# Altium PCB Курсовая.PcbDoc
Units mm, origin at the board's own origin, x right, y up, seen from the top; angles counter-clockwise.
Board outline 43.05 x 29.72 mm, 2 copper layers (Top Layer, Bottom Layer); 16 components, 14 nets, 40 pads, 3 vias.
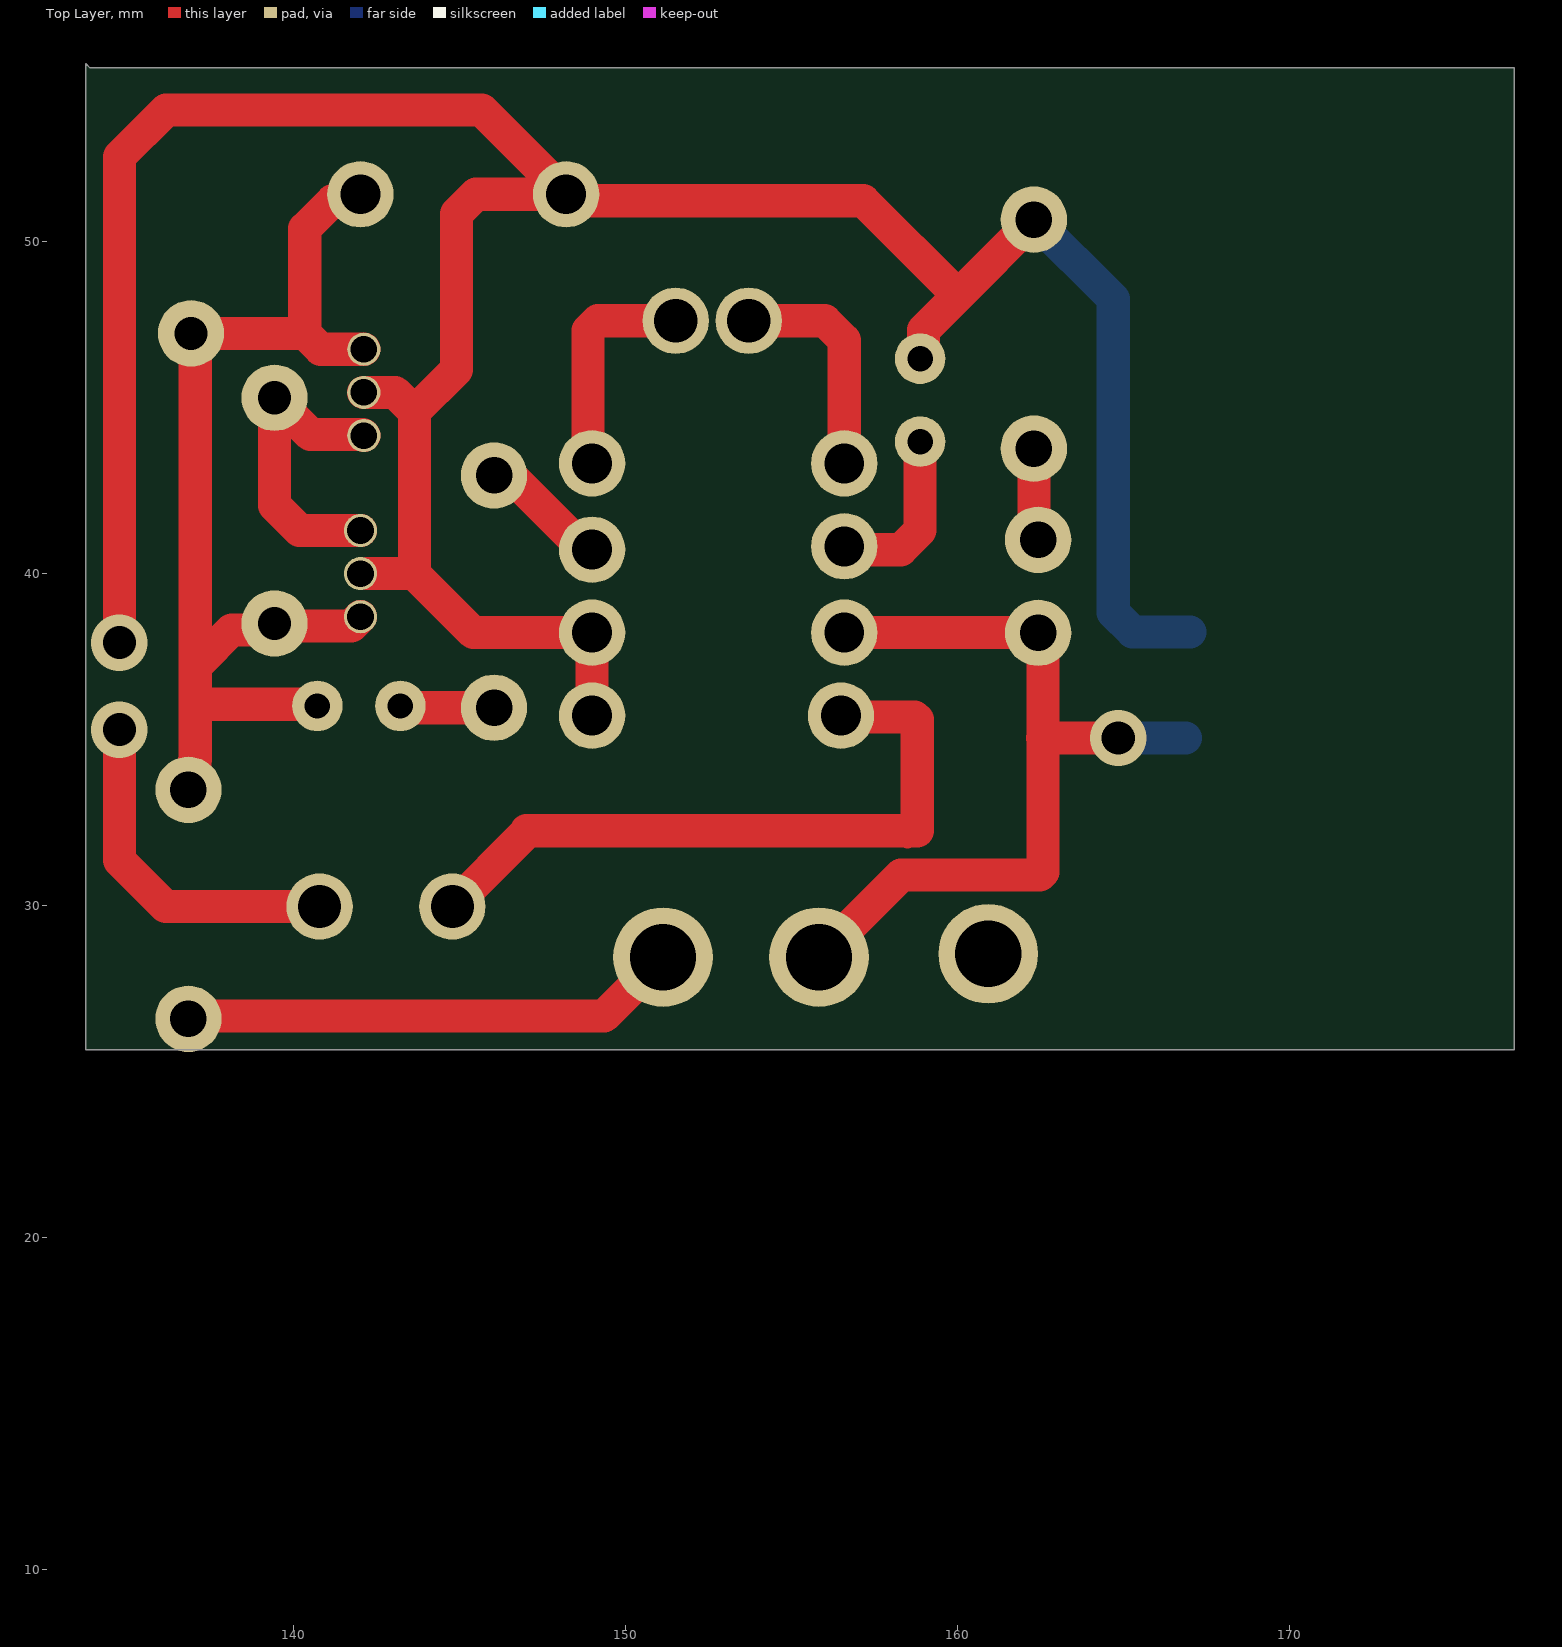
[diagram p0: Top Layer view]
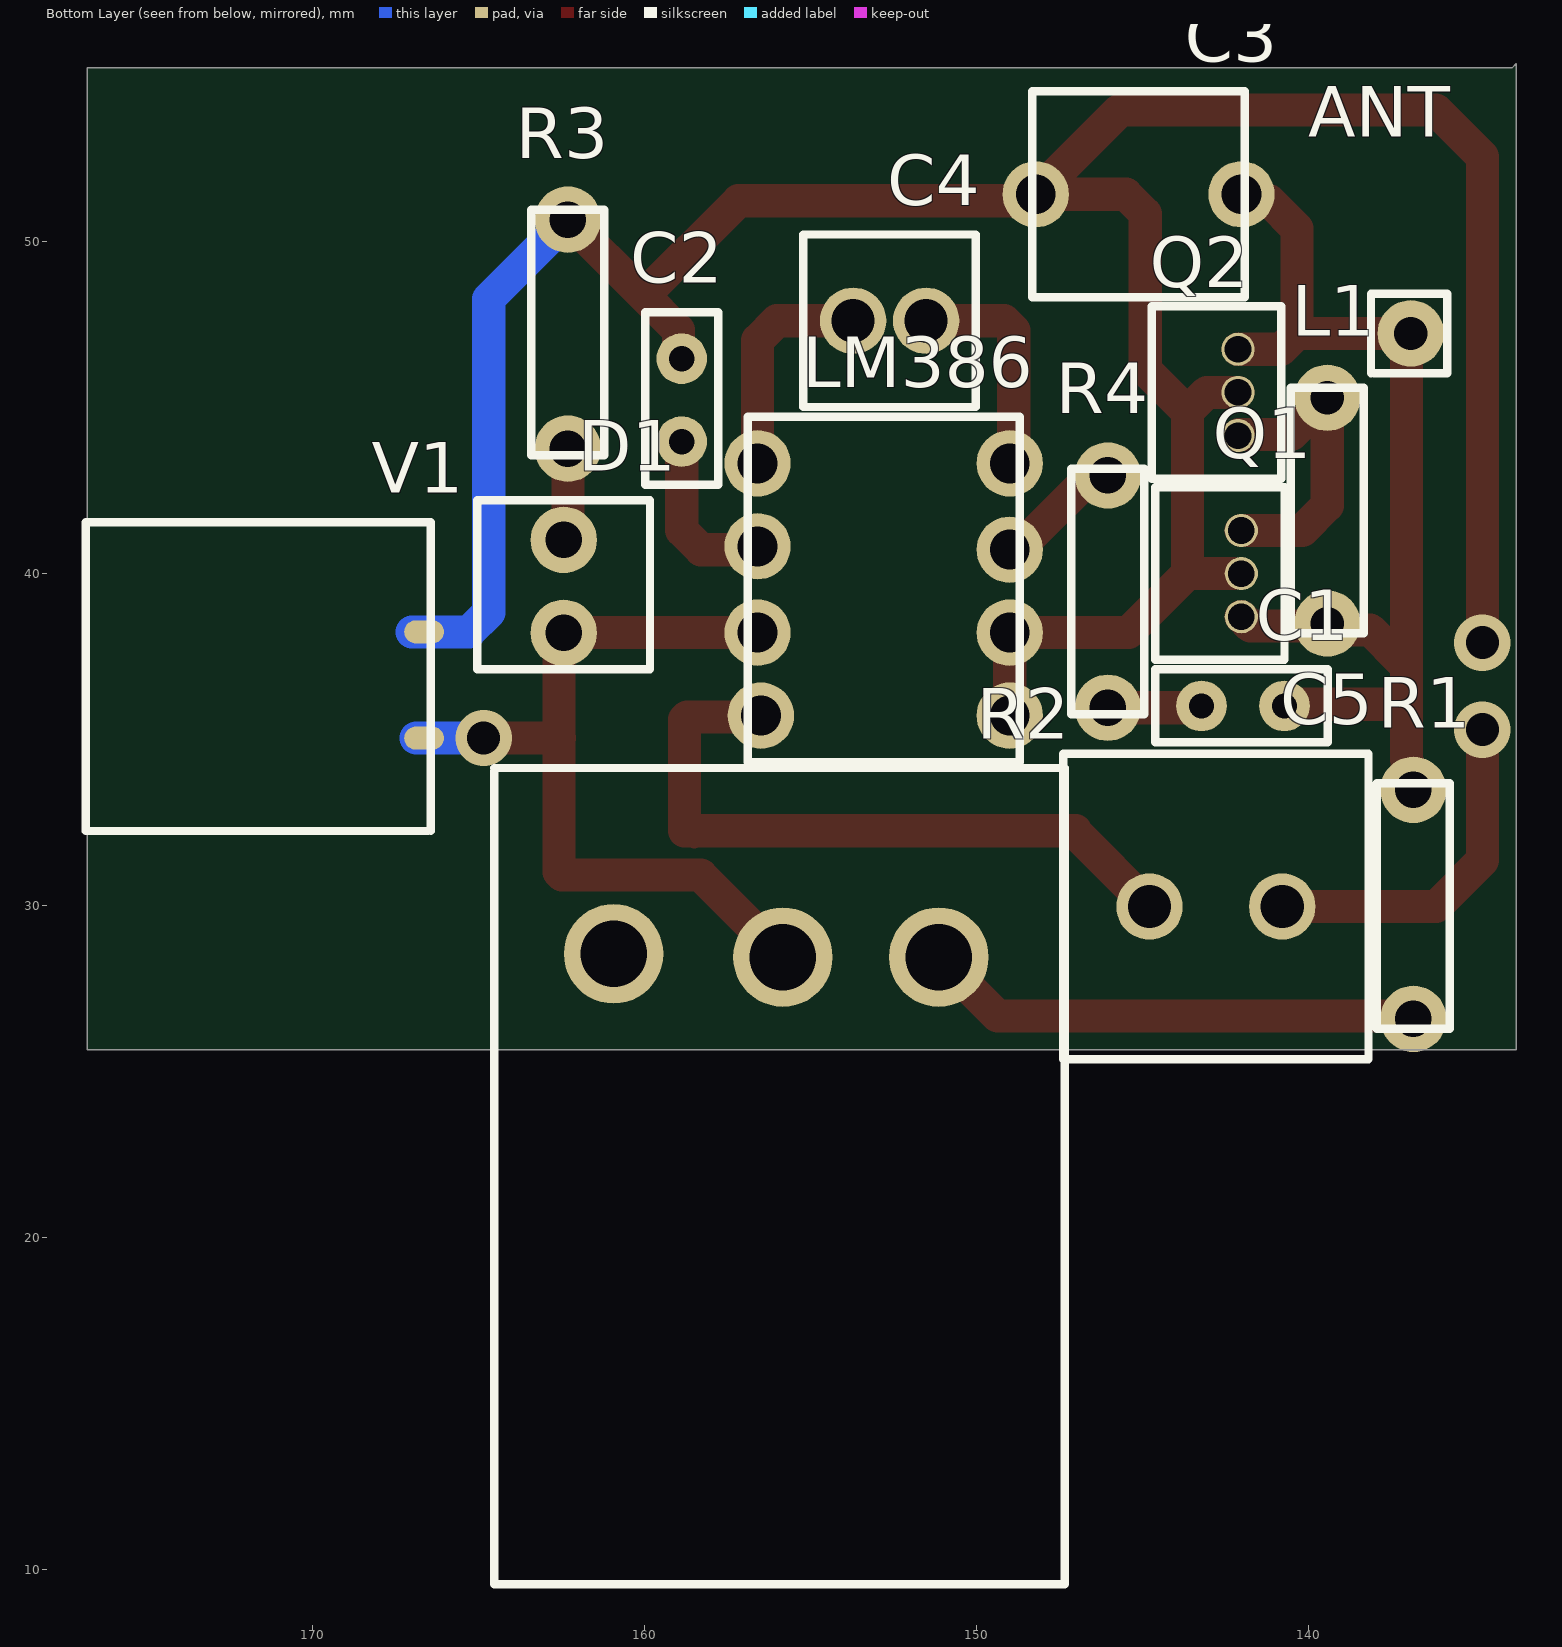
[diagram p1: Bottom Layer view, seen from below]

## Layer stack, top to bottom
Top Solder: solder mask 0.0102, Solder Resist, Dk 3.5
Top Layer: signal copper 0.0356
Dielectric 1: dielectric 0.32, FR-4, Dk 4.8
Bottom Layer: signal copper 0.0356
Bottom Solder: solder mask 0.0102, Solder Resist, Dk 3.5

## Board outline
133.731,25.654 133.731,55.372 133.858,55.245 176.784,55.245 176.784,25.654

## Design rules (kind name [scope] priority, off if disabled: settings)
Clearance [All] p1: gap=0.3 ignorepadtopadclearanceinfootprint=FALSE
PolygonConnect [All] p1: connectstyle=Relief reliefconductorwidth=0.254 reliefentries=4 polygonreliefangle="90 Angle" airgapwidth=0.254
RoutingVias [All] p1: holewidth=1 width=2 viastyle="Through Hole" minholewidth=1 minwidth=1.5 maxholewidth=1.5 maxwidth=2
SolderMaskExpansion [All] p1: expansion=0.102 istentingtop=FALSE
Width [All] p1: maxlimit=1.5 minlimit=0.3 preferedwidth=1
30 further rules are at their usual default settings.

## Components (designator, comment, footprint, x,y, rotation, side; value= is the part's Value field where it differs from the comment)
ANT "ANT" ANT 135.706,47.344 r90 bottom
C1 "100n" "100n capacitor" 141.913,37.719 r0 bottom
C2 "100n" "100n capacitor" 157.177,45.182 r90 bottom
C3 "6.5-30p" "6-30pF capacitor" 148.409,51.335 r180 bottom
C4 "10u" "10uF capacitor" 149.511,48.325 r0 bottom
C5 "470u" "Capacitor 470u" 137.08,30.472 r0 bottom
D1 "LTW-M140ZVS" LED 162.433,42.421 r270 bottom
L1 "15u" "15uH inductor" 137.922,41.402 r90 bottom
LM386 "LM386N-3" LM386 168.791,35.527 r180 bottom
Q1 "BF199" BF199 140.113,40.205 r90 bottom
Q2 "BF199" BF199 140.213,45.666 r90 bottom
R1 "4.7K" "4.7K resistor" 138.528,30.988 r270 bottom
R2 "1-25K" Potentiometer 166.129,23.048 r180 bottom
R3 "100" "100Ohm resistor" 160.406,46.473 r90 bottom
R4 "10K" "10K resistor" 143.736,38.862 r90 bottom
V1 "5V" "mini-USb port" 177.038,36.449 r0 bottom

## Footprints (in the part's own frame and the unit in brackets; to place one, negate y for a bottom-side part, rotate by r counter-clockwise, add the part's x,y. Pads: shape width x height; smd on the part's side, far side on the other; paste and mask are expansions set on the pad)
"4.7K resistor" [mm]
  round 2 hole 1.1: 29(-2.5,1.7) 30(4.4,1.7)
  silkscreen extent -2.7,0.6 4.7,2.8, body extent -2.6,0.7 4.6,2.7, height 2.2
"6-30pF capacitor" [mm]
  round 2 hole 1.2: 21(0.2,0.1) 22(6.4,0.1)
  silkscreen extent 0.1,-3 6.5,3.2, body extent 0.2,-2.9 6.4,3.1, height 5.5
"10K resistor" [mm]
  round 2 hole 1.1: 31(-2.9,2.3) 32(4.1,2.3)
  silkscreen extent -3.1,1.2 4.3,3.4, body extent -3,1.3 4.2,3.3, height 2.2
"10uF capacitor" [mm]
  round 2 hole 1.3: 23(2,0.7) 24(4.2,0.7)
  silkscreen extent 0.5,-1.9 5.7,3.3, body extent 0.6,-1.8 5.6,3.2, height 11
"15uH inductor" [mm]
  round 2 hole 1: 25(3.9,1.5) 26(-2.9,1.5)
  silkscreen extent -3.2,0.4 4.2,2.6, body extent -3.1,0.5 4.1,2.5, height 2.2
"100n capacitor" [mil]
  round 60 hole 30: 19(-47.24,66.93) 20(51.18,66.93)
  silkscreen extent -98,24 106,110, body extent -94,28 102,106, height 236
"100Ohm resistor" [mm]
  round 2 hole 1.1: 27(-2.7,1.9) 28(4.2,1.9)
  silkscreen extent -2.9,0.8 4.5,3, body extent -2.8,0.9 4.4,2.9, height 2.2
ANT [mm]
  round 2 hole 1: 35(-0.1,1.2)
  silkscreen extent -1.3,0.1 1.1,2.4, body extent -4.95,0.95 5.05,1.45, height 10.5
BF199 [mm]
  round 1 hole 0.8: 11(-1.5,1.9) 12(-0.2,1.9) 13(1.1,1.9)
  silkscreen extent -2.8,0.6 2.4,4.5, body extent -2.7,0.7 2.3,4.4, height 5.5
"Capacitor 470u" [mm]
  round 2 hole 1.3: 9(3.7,0.5) 10(7.7,0.5)
  silkscreen extent 1.1,-4.1 10.3,5.1, body extent 1.2,-4 10.2,5, height 11.8
LED [mm]
  round 2 hole 1.1: 33(1.4,0) 34(4.2,0)
  silkscreen extent 0.2,-2.6 5.3,2.6, body extent 0.3,-2.5 5.2,2.5, height 9.5
LM386 [mm]
  round 2 hole 1.2: 1(12.2,7.8) 2(12.2,5.3) 3(12.2,2.7) 4(12.3,0.2) 5(19.8,0.2) 6(19.8,2.7) 7(19.8,5.2) 8(19.8,7.8)
  silkscreen extent 11.9,-1.2 20.1,9.2, body extent 12.04,-1.1 19.96,9.1, height 4.2
"mini-USb port" [mm]
  oval 1.2x0.7 smd: 17(-10.4,1.4) 18(-10.4,-1.8)
  silkscreen extent -10.6,-5.1 -0.2,4.2, body extent -10.4,-4.9 -0.4,4.1, height 3
Potentiometer [mm]
  round 3 hole 2: 14(5.2,5.5) 15(10.3,5.4) 16(15,5.4)
  silkscreen extent 1.6,-13.5 18.8,11.1, body extent 1.75,-13.4 18.65,10.9, height 23.45

## Part data
C1: library part CL05A104KP5NNND_1, "Cap Ceramic 0.1uF 10V X5R 10% SMD 0402 85C Paper T/R", Capacitance=100nF, Case/Package=0402, Dielectric=X5R, Manufacturer=Samsung, Manufacturer Part Number=CL05A104KP5NNND, Max Operating Temperature=85°C, Min Operating Temperature=-55°C, Package Quantity=50000, Supplier Part Number 1=CL05A104KP5NNND-ND, Tolerance=10%, Voltage=10V, Category="Ceramic Capacitors", ComponentLink1Description=https://datasheet.ciiva.com/25744/cl05a104kp5nnnd-25744885.pdf?src-supplier=Digi-Key, ComponentLink1URL=https://datasheet.ciiva.com/25744/cl05a104kp5nnnd-25744885.pdf?src-supplier=Digi-Key, ComponentLink2Description=https://datasheet.ciiva.com/26838/getdatasheetpartid-353245-26838153.pdf?src-supplier=Verical, ComponentLink2URL=https://datasheet.ciiva.com/26838/getdatasheetpartid-353245-26838153.pdf?src-supplier=Verical, Construction=Flat, Depth=0.5mm, Height=0.5mm, Lead Free="Lead Free", Length=1mm, Mount="Surface Mount", Packaging="Tape and Reel", Pricing 1="250000=0,00182 (USD)", Radiation Hardening=No, RoHS=Yes, RoHS Compliant=Yes, Series=CL, Supplier 1=Digi-Key, Thickness=0.022inch, Voltage Rating=10V, Voltage Rating (DC)=10V, Width=0.02inch
C2: library part CL05A104KP5NNND, "Cap Ceramic 0.1uF 10V X5R 10% SMD 0402 85C Paper T/R", Capacitance=100nF, Case/Package=0402, Dielectric=X5R, Manufacturer=Samsung, Max Operating Temperature=85°C, Min Operating Temperature=-55°C, Package Quantity=50000, Supplier Part Number 1=CL05A104KP5NNND-ND, Tolerance=10%, Voltage=10V, Category="Ceramic Capacitors", ComponentLink1Description=https://datasheet.ciiva.com/25744/cl05a104kp5nnnd-25744885.pdf?src-supplier=Digi-Key, ComponentLink1URL=https://datasheet.ciiva.com/25744/cl05a104kp5nnnd-25744885.pdf?src-supplier=Digi-Key, ComponentLink2Description=https://datasheet.ciiva.com/26838/getdatasheetpartid-353245-26838153.pdf?src-supplier=Verical, ComponentLink2URL=https://datasheet.ciiva.com/26838/getdatasheetpartid-353245-26838153.pdf?src-supplier=Verical, Construction=Flat, Depth=0.5mm, Height=0.5mm, Lead Free="Lead Free", Length=1mm, Manufacturer Part Number=CL05A104KP5NNND, Mount="Surface Mount", Packaging="Tape and Reel", Pricing 1="250000=0,00182 (USD)", Radiation Hardening=No, RoHS=Yes, RoHS Compliant=Yes, Series=CL, Supplier 1=Digi-Key, Thickness=0.022inch, Voltage Rating=10V, Voltage Rating (DC)=10V, Width=0.02inch
C3: library part GKG30086-05, "Cap Trimmer SMD", Manufacturer="Sprague Goodman", Supplier Part Number 1=SG9122CT-ND, Category="Trimmer / Variable Capacitors", Manufacturer Part Number=GKG30086-05, Pricing 1="1=1,64000, 10=1,59900, 50=1,56820 (USD)", RoHS=Yes, Stock 1=3567, Supplier 1=Digi-Key
C4: library part 106CKE063M, "Aluminum Electrolytic Capacitors - Radial Leaded 10uF 63 Volts 20% LYTICS/IC", Capacitance=10uF, Case/Package=Radial, ESR (Equivalent Series Resistance)=14.9208R, Manufacturer="CDE Illinois Capacitor", Max Operating Temperature=105°C, Min Operating Temperature=-40°C, Package Quantity=1000, Ripple Current=60mA, Supplier Part Number 1=106CKE063M-ND, Tolerance=20%, Voltage Rating=63V, Category="Aluminum Electrolytic Capacitors", ComponentLink1Description=http://www.illinoiscapacitor.com/pdf/seriesDocuments/CKH_CKE%20series.pdf?src-supplier=Digi-Key, ComponentLink1URL=http://www.illinoiscapacitor.com/pdf/seriesDocuments/CKH_CKE%20series.pdf?src-supplier=Digi-Key, Height - Seated (Max)=0.492inch, Lead Pitch=0.079inch, Life (Hours)=2000Hour, Manufacturer Part Number=106CKE063M, Mount="Through Hole", Packaging=Bulk, Polarity=Polar, Pricing 1="10000=0,03278 (USD)", RoHS=Yes, RoHS Compliant=Yes, Supplier 1=Digi-Key
C5: library part ECA-0JHG471B, "Cap Aluminum 470uF 6.3V 20% (6.3 X 11.2mm) Radial 5mm 230mA 1000 hr 105C Ammo Pack", Capacitance=470uF, Case/Package=Radial, Manufacturer=Panasonic, Max Operating Temperature=105°C, Min Operating Temperature=-55°C, Package Quantity=2000, Ripple Current=230mA, Supplier Part Number 1=ECA-0JHG471B-ND, Tolerance=20%, Voltage Rating=6.3V, Category="Aluminum Electrolytic Capacitors", ComponentLink1Description=https://datasheet.ciiva.com/24067/a-e-461514-24067782.pdf?src-supplier=Mouser, ComponentLink1URL=https://datasheet.ciiva.com/24067/a-e-461514-24067782.pdf?src-supplier=Mouser, ComponentLink2Description=https://datasheet.ciiva.com/106/aba0000ce26-106251.pdf?src-supplier=Digi-Key, ComponentLink2URL=https://datasheet.ciiva.com/106/aba0000ce26-106251.pdf?src-supplier=Digi-Key, ComponentLink3Description=https://datasheet.ciiva.com/11680/aba0000ce26-11680205.pdf?src-supplier=Avnet, ComponentLink3URL=https://datasheet.ciiva.com/11680/aba0000ce26-11680205.pdf?src-supplier=Avnet, Diameter=6.3mm, Height=11.2mm, Height - Seated (Max)=0.48inch, Lead Pitch=5mm, Lead/Base Style=Straight, Length=11.2mm, Life (Hours)=1000Hour, Manufacturer Part Number=ECA-0JHG471B, Mount="Through Hole", Packaging="Tape and Reel", Pricing 1="4000=0,07820 (USD)", Radiation Hardening=No, RoHS=Yes, Supplier 1=Digi-Key, Termination=Radial, Voltage Rating (DC)=6.3V
D1: "White 120° Viewing Angle 3 x 1.05 x 1.2 mm 3.5 V 20 mA Surface Mount Lamp", Case/Package=SMD/SMT, Color=White, Correlated Color Temperature (CCT)=-, Forward Current=20mA, Forward Voltage=3.2V, Lens Color=Yellow, Manufacturer="Vishay Lite-On", Max Current Rating=100mA, Max Operating Temperature=85°C, Min Operating Temperature=-30°C, Package Quantity=2000, Supplier Part Number 1=859-LTW-M140ZVS, Category=LEDs, ComponentLink1Description=https://datasheet.ciiva.com/29560/ltw-m140zvs-29560007.pdf?src-supplier=Digi-Key, ComponentLink1URL=https://datasheet.ciiva.com/29560/ltw-m140zvs-29560007.pdf?src-supplier=Digi-Key, ComponentLink2Description=https://datasheet.ciiva.com/24120/ltw-m140zvs-267545-24120598.pdf?src-supplier=Mouser, ComponentLink2URL=https://datasheet.ciiva.com/24120/ltw-m140zvs-267545-24120598.pdf?src-supplier=Mouser, Illumination Color=White, Length=3mm, Lens Style=Rectangular, Manufacturer Part Number=LTW-M140ZVS, Orientation="Top View", Packaging="Tape and Reel", Pricing 1="1=0,45000, 10=0,25000, 50=0,25000, 100=0,11500, 1000=0,08300, 10000=0,05800 (USD)", RoHS=Yes, RoHS Compliant=Yes, Stock 1=14030, Supplier 1=Mouser, Test Current=20mA, Viewing Angle=120°, Width=1.4mm
L1: library part 78F150J-RC, "BOURNS JW MILLER   78F150J-RC   CHOKE, 15UH, 150MA, 5%, 16MHZ", Case/Package=Axial, Current Rating=335mA, DC Resistance (DCR)=930mR, Inductance=15uH, Inductance Tolerance=5%, Manufacturer="Bourns JW Miller", Max Operating Temperature=105°C, Min Operating Temperature=-55°C, Package Quantity=5000, Resistor Type=Wirewound, Self Resonant Frequency=16MHz, Supplier Part Number 1=542-78F150J-RC, Test Frequency=2.5MHz, Category="Fixed Inductors", ComponentLink1Description=https://datasheet.ciiva.com/8105/78f-series-8105197.pdf?src-supplier=Avnet, ComponentLink1URL=https://datasheet.ciiva.com/8105/78f-series-8105197.pdf?src-supplier=Avnet, ComponentLink2Description=https://datasheet.ciiva.com/1474/78f-series-1474693.pdf?src-supplier=Element14, ComponentLink2URL=https://datasheet.ciiva.com/1474/78f-series-1474693.pdf?src-supplier=Element14, ComponentLink3Description=https://datasheet.ciiva.com/6703/78f-series-6703437.pdf?src-supplier=Digi-Key, ComponentLink3URL=https://datasheet.ciiva.com/6703/78f-series-6703437.pdf?src-supplier=Digi-Key, Contact Plating=Tin, Core Material=Ferrite, DC Current=335mA, Diameter=2.79mm, Lead Diameter=0.51mm, Lead/Base Style=Axial, Length=7.11mm, Manufacturer Part Number=78F150J-RC, Max DC Current=335mA, Military Standard=Not, Mount="Through Hole", Packaging=Bag, Pricing 1="1=0,21000, 10=0,15600, 50=0,14200, 100=0,13900, 1000=0,09100, 10000=0,07900 (USD)", Q Factor=50, REACH SVHC="No SVHC", RoHS=Yes, RoHS Compliant=Yes, Series=78F, Shielding=Unshielded, Stock 1=2871, Supplier 1=Mouser, Termination=Axial, Tolerance=5%
LM386: "Audio Amp Speaker 1-CH Mono 0.7W Class-AB 8-Pin PDIP Rail", Case/Package=P, Input Bias Current=250nA, Input Offset Voltage (Vos)=2.5mV, Manufacturer="TI National Semiconductor", Max Operating Temperature=70°C, Max Output Power=700mW, Max Power Dissipation=1.25W, Max Supply Voltage=12V, Min Operating Temperature=0°C, Min Supply Voltage=4V, Nominal Supply Current=4mA, Output Power=1W, Package Quantity=40, Power Supply Rejection Ratio (PSRR)=50dB, Quiescent Current=8mA, Supplier Part Number 1=2156-LM386N-3-ND, Voltage Gain=46dB, Amplifier Type=POWER, Bandwidth=300kHz, Category="Amplifiers - Audio", ComponentLink1Description=https://datasheet.ciiva.com/2968/lm386-2968336.pdf?src-supplier=Avnet, ComponentLink1URL=https://datasheet.ciiva.com/2968/lm386-2968336.pdf?src-supplier=Avnet, ComponentLink2Description=https://datasheet.ciiva.com/15131/getdatasheetpartid-186304-15131754.pdf?src-supplier=Verical, ComponentLink2URL=https://datasheet.ciiva.com/15131/getdatasheetpartid-186304-15131754.pdf?src-supplier=Verical, ComponentLink3Description=https://datasheet.ciiva.com/26842/lm386n-3-26842542.pdf?src-supplier=IIIC, ComponentLink3URL=https://datasheet.ciiva.com/26842/lm386n-3-26842542.pdf?src-supplier=IIIC, ComponentLink4Description=https://datasheet.ciiva.com/1480/1640767-1480995.pdf?src-supplier=Element14, ComponentLink4URL=https://datasheet.ciiva.com/1480/1640767-1480995.pdf?src-supplier=Element14, ComponentLink5Description=https://datasheet.ciiva.com/6625/lm386-6625686.pdf?src-supplier=Digi-Key, ComponentLink5URL=https://datasheet.ciiva.com/6625/lm386-6625686.pdf?src-supplier=Digi-Key, Gain Bandwidth Product=300kHz, Height=3.3mm, Lead Free="Contains Lead", Length=9.27mm, Load Impedance=8R, Manufacturer Part Number=LM386N-3, Number of Amplifiers=1, Number of Channels=1, Number of Pins=8, Packaging=Rail/Tube, Power Dissipation=1.25W, Radiation Hardening=No, REACH SVHC="No SVHC", RoHS=No, RoHS Compliant=No, Series=LM386, Supplier 1=Digi-Key, Supply Current=4mA, Supply Type=Single, Unity Gain Bandwidth Product=300kHz, Weight=0.5lb, Width=6.35mm
Q1 Q2: "TRANSISTOR RF NPN 25V 50MA TO-92", Case/Package=TO-92, Collector Base Voltage (VCBO)=40V, Collector Emitter Breakdown Voltage=25V, Continuous Collector Current=50mA, Emitter Base Voltage (VEBO)=4V, Frequency=1.1GHz, Manufacturer="ON Semiconductor / Fairchild", Max Operating Temperature=150°C, Max Power Dissipation=350mW, Min Operating Temperature=-55°C, Package Quantity=2000, Supplier Part Number 1=BF199FS-ND, Category=BJTs, Collector Emitter Voltage (VCEO)=25V, ComponentLink1Description=https://datasheet.ciiva.com/965/bf199-965939.pdf?src-supplier=Digi-Key, ComponentLink1URL=https://datasheet.ciiva.com/965/bf199-965939.pdf?src-supplier=Digi-Key, ComponentLink2Description=https://datasheet.ciiva.com/1196/200356-1196561.pdf?src-supplier=Element14, ComponentLink2URL=https://datasheet.ciiva.com/1196/200356-1196561.pdf?src-supplier=Element14, ComponentLink3Description=https://datasheet.ciiva.com/1196/200356-1196562.pdf?src-supplier=Element14, ComponentLink3URL=https://datasheet.ciiva.com/1196/200356-1196562.pdf?src-supplier=Element14, ComponentLink4Description=https://datasheet.ciiva.com/1217/200356-1217723.pdf?src-supplier=Farnell, ComponentLink4URL=https://datasheet.ciiva.com/1217/200356-1217723.pdf?src-supplier=Farnell, Current Rating=50mA, Element Configuration=Single, Gain Bandwidth Product=1.1GHz, hFE Min=38, Lead Free="Lead Free", Manufacturer Part Number=BF199, Max Collector Current=50mA, Max Frequency=1.1GHz, Mount="Through Hole", Number of Elements=1, Number of Pins=3, Packaging=Bulk, Polarity=NPN, Power Dissipation=350mW, REACH SVHC="No SVHC", RoHS=No, Supplier 1=Digi-Key, Transition Frequency=1.1GHz, Voltage Rating (DC)=25V, Weight=0.202g
R1: library part SG731JTTD472M, "Thick Film Resistors - SMD 0.1W 4.7Kohm 20% 200ppm", Case Code (Imperial)=0603, Case Code (Metric)=1608, Manufacturer="KOA Speer", Max Operating Temperature=155°C, Min Operating Temperature=-55°C, Package Quantity=5000, Power Rating=100mW, Resistance=4.7kR, Resistor Type="Thick Film", Supplier Part Number 1=2019-SG731JTTD472MTR-ND, Temperature Coefficient=200ppm/°C, Tolerance=20%, Voltage Rating=50V, Case/Package=0603, Category="Chip SMD Resistors", ComponentLink1Description=http://www.koaspeer.com/catimages/Products/SG73/SG73.pdf?src-supplier=Mouser, ComponentLink1URL=http://www.koaspeer.com/catimages/Products/SG73/SG73.pdf?src-supplier=Mouser, Height=0.45mm, Length=1.6mm, Manufacturer Part Number=SG731JTTD472M, Packaging="Tape and Reel", Pricing 1="5000=0,01564 (USD)", RoHS=Yes, RoHS Compliant=Yes, Series=SG73, Supplier 1=Digi-Key, Termination=SMD/SMT, Voltage Rating (DC)=50V, Width=0.8mm
R2: library part CB6MH253M, "Res Carbon Film Trimmer 25K Ohm 20% 0.15W 1(Elec)/1(Mech)Turn (9.8 X 5 X 12.1mm) Pin Thru-Hole", Manufacturer="TE Connectivity Citec", Power Rating=100mW, Resistance=25kR, Supplier Part Number 1=CB6MH253M-ND, Tolerance=20%, Category="Variable Resistors and Potentiometers", ELV=Compliant, Manufacturer Part Number=CB6MH253M, Mount=Radial, Pricing 1="1000=0,62682 (USD)", RoHS=Yes, RoHS Compliant=Yes, Sealable="No (Without)", Supplier 1=Digi-Key
R3: library part SR0805MR-7W100RL, "Res 100 Ohm 20% 1/4W 0805", Case/Package=0805, Manufacturer=Yageo, Max Operating Temperature=155°C, Max Power Dissipation=250mW, Min Operating Temperature=-55°C, Resistance=100R, Resistor Type="Thick Film", Supplier Part Number 1=SR0805MR-7W100RL-ND, Temperature Coefficient=200ppm/°C, Tolerance=20%, Category="Chip SMD Resistors", ComponentLink1Description=http://www.yageo.com/documents/recent/PYu-SR_20105_RoHS_L_5.pdf?src-supplier=Digi-Key, ComponentLink1URL=http://www.yageo.com/documents/recent/PYu-SR_20105_RoHS_L_5.pdf?src-supplier=Digi-Key, Features="Automotive AEC-Q200", Height=0.024inch, Length=0.079inch, Manufacturer Part Number=SR0805MR-7W100RL, Number of Terminations=2, Packaging="Tape and Reel", Pricing 1="5000=0,02251 (USD)", RoHS=Yes, Supplier 1=Digi-Key, Width=0.049inch
R4: library part FCR0603MT10K0, "Res Thick Film 0603 10kOhm 20% 1/10W ±200ppm/°C Molded Paper T/R", Manufacturer="Stackpole Electronics", Supplier Part Number 1=FCR0603MT10K0-ND, ComponentLink1Description=http://datasheet.octopart.com/FCR0603MT10K0-Stackpole-Electronics-datasheet-141158313.pdf?src-supplier=Stackpole+Electronics, ComponentLink1URL=http://datasheet.octopart.com/FCR0603MT10K0-Stackpole-Electronics-datasheet-141158313.pdf?src-supplier=Stackpole+Electronics, Manufacturer Part Number=FCR0603MT10K0, Pricing 1="5000=0,01250 (USD)", RoHS Compliant=Yes, Supplier 1=Digi-Key
V1: library part M701-340542, "USB Connectors MINI USB SINGLE SMT 5P HORIZONTAL", Color=Black, Current Rating=1A, Insulation Resistance=100MR, Manufacturer=Harwin, Max Operating Temperature=105°C, Min Operating Temperature=-55°C, Package Quantity=68, Supplier Part Number 1=952-2197-ND, Category=Connectors, ComponentLink1Description=https://datasheet.ciiva.com/4599/m701-340542-53541-4599048.pdf?src-supplier=Mouser, ComponentLink1URL=https://datasheet.ciiva.com/4599/m701-340542-53541-4599048.pdf?src-supplier=Mouser, ComponentLink2Description=https://datasheet.ciiva.com/3095/m701-340542-3095669.pdf?src-supplier=Avnet, ComponentLink2URL=https://datasheet.ciiva.com/3095/m701-340542-3095669.pdf?src-supplier=Avnet, Connector Type=USB,Receptacle, Contact Material=Bronze, Contact Plating=Gold, Depth=9.3mm, Gender=Receptacle, Housing Material=Polymer, Length=9.9mm, Manufacturer Part Number=M701-340542, Max Current Rating=1A, Mount="Surface Mount,Horizontal", Number of Contacts=5, Number of Ports=1, Number of Positions=5, Number of Terminals/Pins=5, Orientation="Right Angle", Packaging=Bulk, Pitch=0.8mm, Pricing 1="1=1,23000, 10=1,07900, 25=1,01520, 50=0,97300, 100=0,93060, 250=0,84600, 500=0,76140, 1000=0,67680, 2500=0,61335 (USD)", RoHS=Yes, RoHS Compliant=Yes, Series=M701, Stock 1=89, Supplier 1=Digi-Key, Termination=Solder

## Via types
v1: diameter 1.7, hole 1, Top Layer to Bottom Layer, 3 vias

## Nets (pads, with @x,y where several pads share a name; then routed paths per layer and width w, separated by ;. In a path a pad name is that pad's centre, name@x,y a point inside that pad or via, vN(x,y) a via of type N, cw(c..) or ccw(c..) an arc to the next point about the centre after c; other vN are vias at no path point)
+5V: 
GND: 
NetANT_1: 
NetC1_1: 
NetC2_2: 
NetC4_3: 
NetC4_+: 
NetC5_2: 
NetC5_+: 
NetD1_1: 
NetL1_7: 
NetLM386_2: 
NetR1_1: 
NetR3_1: 
pads on no net: ANT.35 C1.19 C1.20 C2.19 C2.20 C3.21 C3.22 C4.23 C4.24 C5.9 C5.10 D1.33 D1.34 L1.25 L1.26 LM386.1 LM386.2 LM386.3 LM386.4 LM386.5 LM386.6 LM386.7 LM386.8 Q1.11 Q1.12 Q1.13 Q2.11 Q2.12 Q2.13 R1.29 R1.30 R2.14 R2.15 R2.16 R3.27 R3.28 R4.31 R4.32 V1.17 V1.18
copper on no net: | length 234.7
  Top Layer w0.5: 148.873,43.445 148.991,43.327 ; 158.496,31.965 158.789,32.258 ; 158.711,35.687 159.004,35.394 ; 162.296,30.734 162.589,31.027 ; 162.306,41.148 162.433,41.021
  Top Layer w1: v1(134.747,35.306) 134.747,31.369 136.144,29.972 140.78,29.972 ; v1(134.747,37.927) 134.747,52.567 136.155,53.975 145.669,53.975 148.305,51.339 ; 136.828,26.67 149.351,26.67 151.129,28.448 ; 136.828,33.488 137.019,33.679 137.019,34.386 137.033,34.4 137.033,36.068 ; 136.906,47.244 140.335,47.244 ; 137.033,47.244 137.033,37.338 137.033,36.068 ; 137.16,37.338 138.133,38.311 139.231,38.311 139.422,38.502 139.496,38.428 141.736,38.428 142.013,38.705 ; 140.713,36.019 140.664,36.068 137.033,36.068 ; 142.009,51.435 141.818,51.244 141.177,51.244 140.335,50.402 140.335,47.244 ; 142.013,41.305 140.178,41.305 139.422,42.061 139.422,45.302 139.422,45.282 140.508,44.196 142.083,44.196 142.113,44.166 ; 142.113,45.466 143.051,45.466 143.637,44.88 ; 142.113,46.766 140.813,46.766 140.335,47.244 ; 142.24,40.005 143.637,40.005 ; 143.313,35.962 146.036,35.962 ; 144.78,29.972 147.011,32.203 ; 146.307,42.962 146.036,42.962 146.522,42.962 148.717,40.767 148.931,40.767 ; 147.011,32.258 158.789,32.258 158.789,35.609 ; 148.873,43.445 148.873,47.332 149.166,47.625 151.798,47.625 ; 148.991,35.727 148.991,38.227 145.415,38.227 143.637,40.005 ; 153.711,47.625 156.005,47.625 156.591,47.039 156.591,43.327 ; 155.829,28.448 158.301,30.92 162.483,30.92 ; 156.591,35.727 156.631,35.687 158.711,35.687 ; 156.591,38.227 162.427,38.227 162.433,38.221 162.577,38.077 162.577,35.052 162.577,31.015 ; 156.591,40.727 158.291,40.727 158.877,41.313 158.877,43.982 ; 158.877,46.482 158.977,46.582 158.977,47.344 160.02,48.387 ; 162.306,41.148 162.306,43.773 ; 162.306,50.673 160.02,48.387 ; 162.56,35.052 v1(164.846,35.052) ; 143.637,40.005 143.637,44.88 ; 143.637,44.88 144.907,46.15 144.907,50.849 145.493,51.435 148.209,51.435 148.4,51.244 157.163,51.244 160.02,48.387
  Bottom Layer w1: 162.306,50.673 164.694,48.285 164.694,38.835 165.28,38.249 167.005,38.249 ; v1(164.846,35.052) 166.875,35.052